# Altium PCB Placa 5.PcbDoc
Units mm, origin at the board's own origin, x right, y up, seen from the top; angles counter-clockwise.
Board outline 64 x 64 mm, 2 copper layers (Top Layer, Bottom Layer), stack 1.571 mm thick; 5 components, 4 nets, 27 pads, 0 vias.
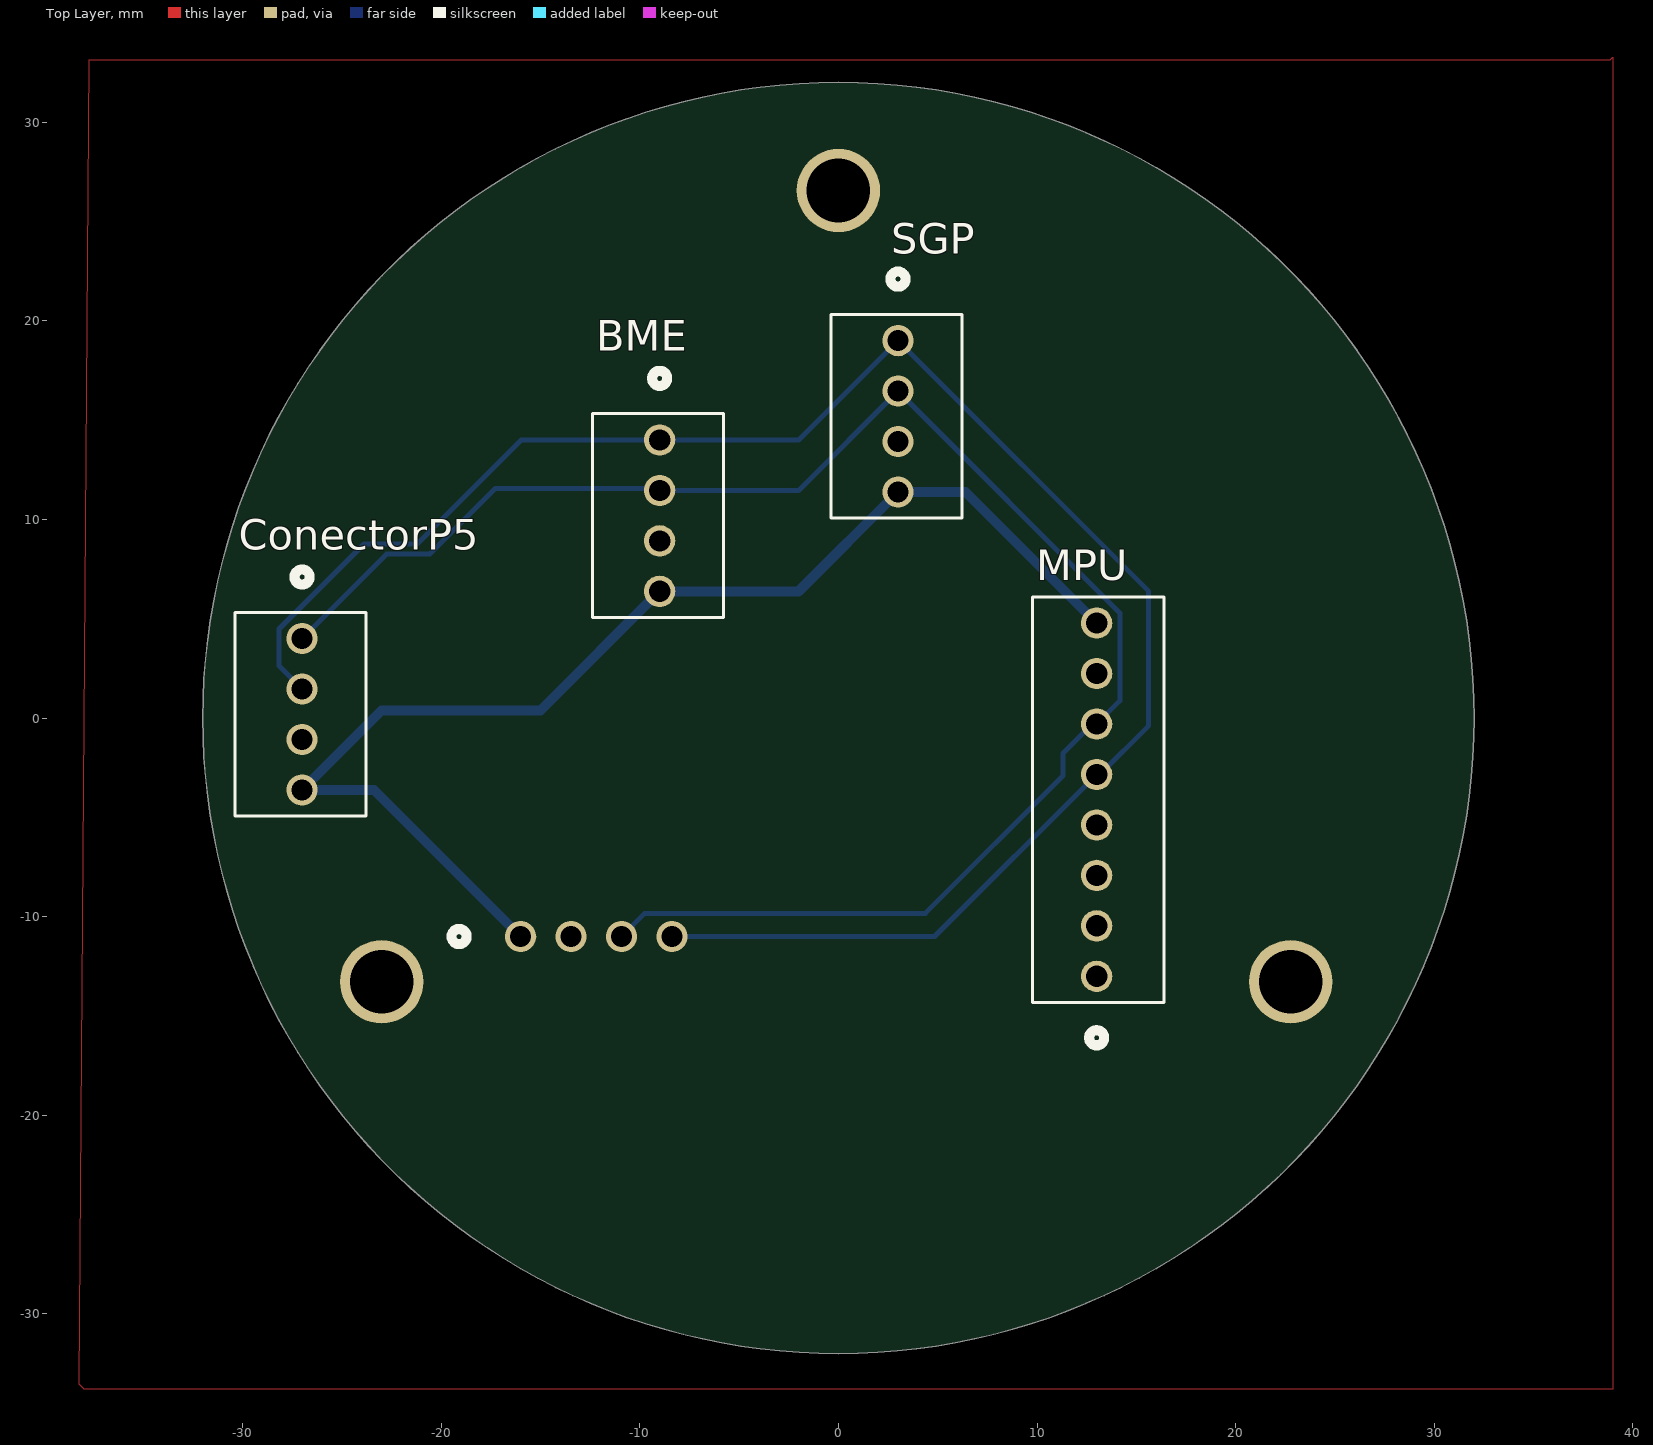
[diagram p0: Top Layer view]
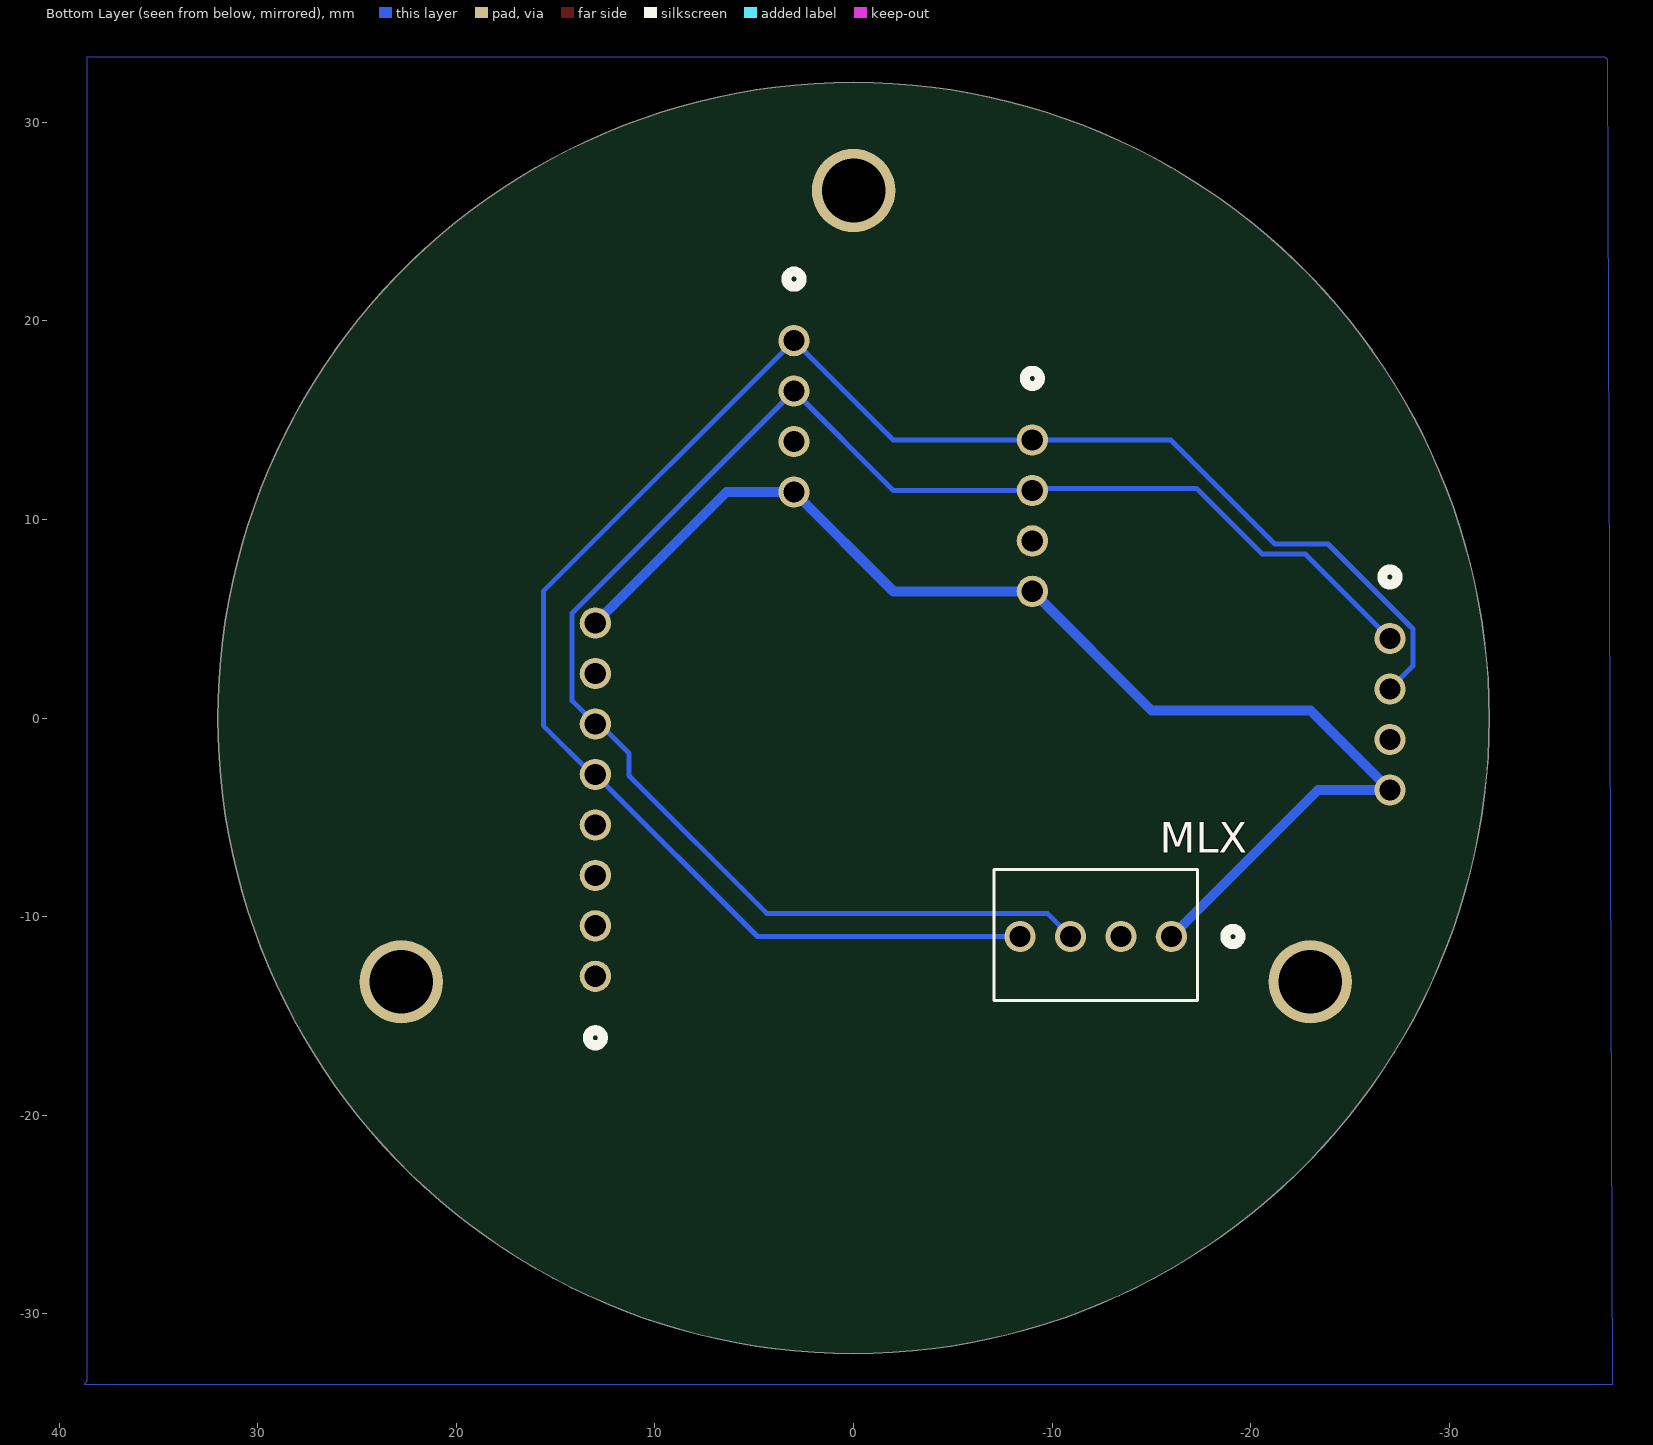
[diagram p1: Bottom Layer view, seen from below]

## Layer stack, top to bottom
Top Solder: solder mask 0.0102, Solder Resist, Dk 3.5
Top Layer: signal copper 0.0356
Dielectric 1: dielectric 1.5, FR-4, Dk 4.8
Bottom Layer: signal copper 0.0356
Bottom Solder: solder mask 0.0102, Solder Resist, Dk 3.5

## Board outline
-32,0 ccw(c0,0) 0,-32 ccw(c0,0) 32,0 ccw(c0,0) 0,32 ccw(c0,0)

## Design rules (kind name [scope] priority, off if disabled: settings)
Clearance [All] p1: gap=0.15 ignorepadtopadclearanceinfootprint=FALSE
HoleSize [All] p1: absolutevalues=TRUE maxlimit=5 minlimit=0.025 maxpercent=80.000 minpercent=20.000
PolygonConnect [All] p1: connectstyle=Relief reliefconductorwidth=0.254 reliefentries=4 polygonreliefangle="90 Angle" airgapwidth=0.254
RoutingVias [All] p1: holewidth=0.711 width=1.27 viastyle="Through Hole" minholewidth=0.711 minwidth=1.27 maxholewidth=0.711 maxwidth=1.27
SolderMaskExpansion [All] p1: expansion=0 istentingtop=FALSE
Width [All] p1: maxlimit=1 minlimit=0.15 preferedwidth=0.254
29 further rules are at their usual default settings.

## Classes and differential pairs
component class "Placa 5 (Sensores)": MLX MPU SGP

## Components (designator, comment, footprint, x,y, rotation, side; value= is the part's Value field where it differs from the comment)
BME "22112042" CONN_A-6373-04A_MOL -9,14 r270 top
ConectorP5 "22112042" CONN_A-6373-04A_MOL -27,4 r270 top
MLX "22112042" CONN_A-6373-04A_MOL -16,-11 r0 bottom
MPU "22112082" CONN_A-6373-08A_MOL 13,-13 r90 top
SGP "22112042" CONN_A-6373-04A_MOL 3,19 r270 top

## Footprints (in the part's own frame and the unit in brackets; to place one, negate y for a bottom-side part, rotate by r counter-clockwise, add the part's x,y. Pads: shape width x height; smd on the part's side, far side on the other; paste and mask are expansions set on the pad)
CONN_A-6373-04A_MOL [mil]
  round 62 hole 42: 1(0,0) 2(100,0) 3(200,0) 4(300,0)
  silkscreen extent -137,-133 352,127
CONN_A-6373-08A_MOL [mil]
  round 62 hole 42: 1(0,0) 2(100,0) 3(200,0) 4(300,0) 5(400,0) 6(500,0) 7(600,0) 8(700,0)
  silkscreen extent -137,-133 752,127

## Part data
BME ConectorP5 MLX SGP: Package=None, Availability=Unavailable, MP=22112042, Price=None
MPU: "KKÂ® 254 Solid Header, Vertical, with Friction Lock, 8 Circuits, Gold (Au) Plating", Package=None, Check_prices=https://www.snapeda.com/parts/22-11-2082/Molex/view-part/?ref=eda, MF=Molex, MP=22-11-2082, SnapEDA_Link=https://www.snapeda.com/parts/22-11-2082/Molex/view-part/?ref=snap

## Free pads (board coordinates)
  round 4.2 hole 3.2: ""(-22.997,-13.279) ""(0,26.558) ""(22.765,-13.279)

## Nets (pads, with @x,y where several pads share a name; then routed paths per layer and width w, separated by ;. In a path a pad name is that pad's centre, name@x,y a point inside that pad or via, vN(x,y) a via of type N, cw(c..) or ccw(c..) an arc to the next point about the centre after c; other vN are vias at no path point)
GND: BME.3 ConectorP5.3 MLX.2 MPU.7 pad. SGP.3
SCL: BME.2 ConectorP5.1 MLX.3 MPU.6 SGP.2 | length 86.1
  Bottom Layer w0.254: ConectorP5.1 -22.745,8.255 -20.574,8.255 -17.272,11.557 -9.097,11.557 BME.2 -2,11.46 SGP.2 14.168,5.292 14.168,0.868 MPU.6 12.781,-0.3 11.303,-1.778 11.303,-2.899 4.371,-9.832 -9.752,-9.832 MLX.3
SDA: BME.1 ConectorP5.2 MLX.4 MPU.5 SGP.1 | length 93.7
  Bottom Layer w0.254: ConectorP5.2 -28.168,2.628 -28.168,4.484 -23.889,8.763 -21.209,8.763 -15.972,14 BME.1 -2.002,14 2.998,19 SGP.1 15.621,6.379 15.621,-0.381 13.162,-2.84 MPU.5 4.84,-11 MLX.4
VIN: BME.4 ConectorP5.4 MLX.1 MPU.8 SGP.4 | length 63
  Bottom Layer w0.5: MLX.1 -23.38,-3.62 ConectorP5.4 -22.999,0.381 -14.999,0.381 BME.4 -2,6.38 SGP.4 6.4,11.38 MPU.8
pads on no net: MPU.1 MPU.2 MPU.3 MPU.4

## Polygon pours and split planes (outlines as drawn)
GND on Top Layer "NONET_L01_P-001" (solid, remove dead copper, shelved, pour order 0): -37.719,33.147 38.862,33.147 38.989,33.274 38.989,-33.782 -37.973,-33.782 -38.227,-33.528
GND on Bottom Layer "NONET_L01_P-001" (solid, remove dead copper, shelved, pour order 1): -37.973,33.147 -37.846,33.274 38.608,33.274 38.608,-33.401 38.735,-33.528 -38.227,-33.528

## Silkscreen, mask and mechanical layers (free items; w line width, h text height)
Mechanical 1:
  circle w0.254: c0,0 r32